# EAGLE board numi_clock (EAGLE 7.4.0)
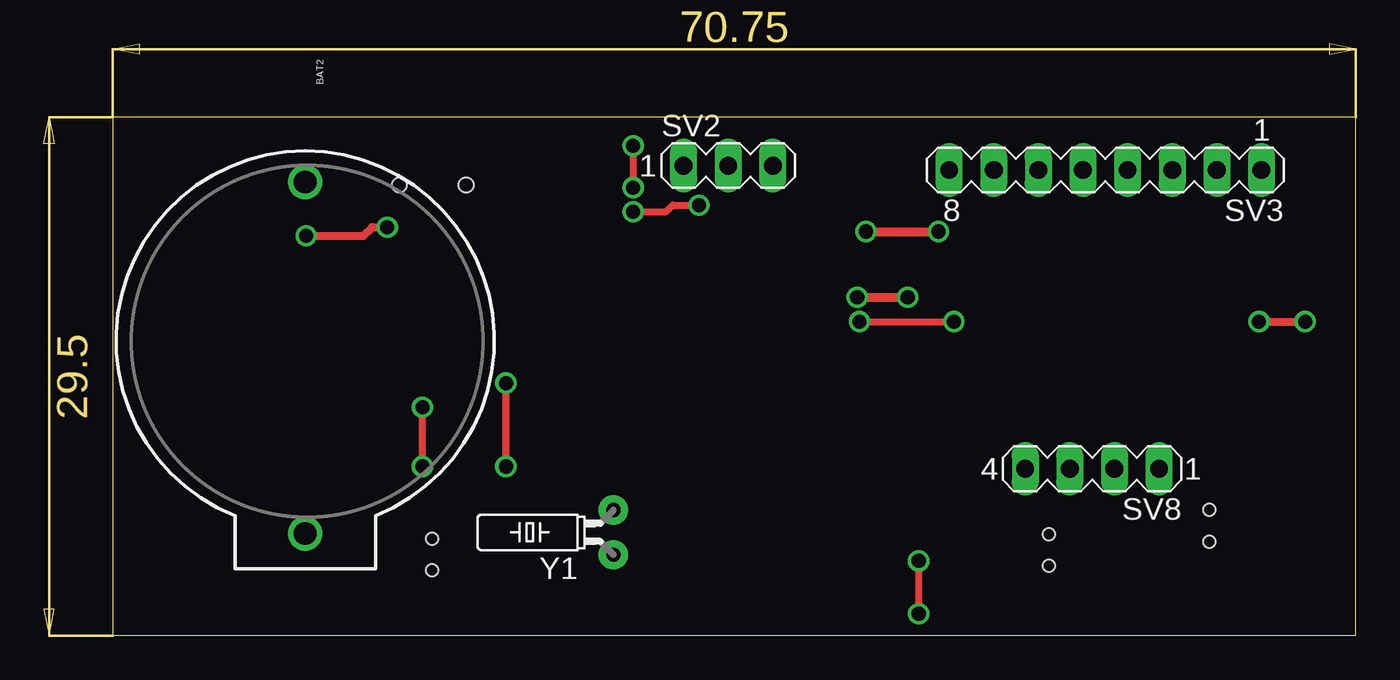
[diagram p0: board, top side]
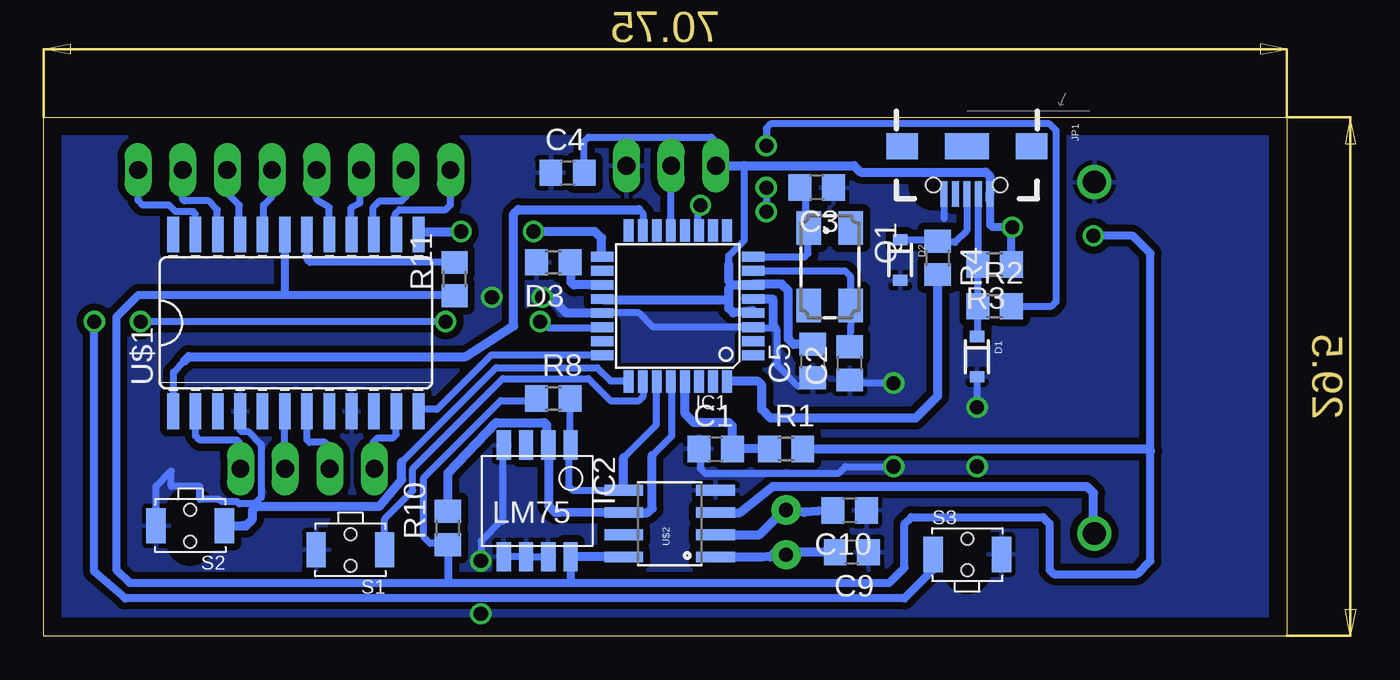
[diagram p1: board, bottom side, seen from below]

Size 70.75 x 29.5 mm. Coordinates in mm from the lower left corner, seen from the top.
Outline: 70.75,0 70.75,29.5 0,29.5 0,0 70.75,0
Copper layers (1*16): Top 0.035mm / dielectric 1.5mm / Bottom 0.035mm
Design rules "default": minimum track width 10mil, minimum drill 24mil, track to track 8mil, track to pad 8mil, pad to pad 8mil, via to via 8mil, smd to smd 8mil, copper to edge 40mil, drill to drill 8mil, minimum pad ring 10mil, minimum via ring 8mil, stop-mask expansion 4mil, vias tented up to drill 0mil, thermal gap 10mil

## Footprints (pad centres in the part's own frame; a part is rotated, then mirrored left to right if it is on the bottom)
BATTCOM_20MM_PTH = drill 1.3: 1 20,0; 2 0,0
C0805 = smd 1.3 x 1.5: 1 -0.95,0; 2 0.95,0
SOD-323 = smd 0.63 x 0.83: A 1.15,0; C -1.15,0
R0805 = smd 1.3 x 1.5: 1 -0.95,0; 2 0.95,0
TQFP32-08 = smd 1.27 x 0.559: 1 -4.293,2.8; 2 -4.293,2; 3 -4.293,1.2; 4 -4.293,0.4; 5 -4.293,-0.4; 6 -4.293,-1.2; 7 -4.293,-2; 8 -4.293,-2.8; 17 4.293,-2.8; 18 4.293,-2; 19 4.293,-1.2; 20 4.293,-0.4; 21 4.293,0.4; 22 4.293,1.2; 23 4.293,2; 24 4.293,2.8 | smd 0.559 x 1.27: 9 -2.8,-4.293; 10 -2,-4.293; 11 -1.2,-4.293; 12 -0.4,-4.293; 13 0.4,-4.293; 14 1.2,-4.293; 15 2,-4.293; 16 2.8,-4.293; 25 2.8,4.293; 26 2,4.293; 27 1.2,4.293; 28 0.4,4.293; 29 -0.4,4.293; 30 -1.2,4.293; 31 -2,4.293; 32 -2.8,4.293
SO8_LM75 = smd 0.813 x 1.676: 1 -1.27,-3.175; 2 0,-3.175; 3 1.27,-3.175; 4 2.54,-3.175; 5 2.54,3.175; 6 1.27,3.175; 7 0,3.175; 8 -1.27,3.175
USB-B-MICRO-SMD_V03 = smd 1.45 x 0.4: D+1 2.725,0; D-1 2.725,0.65; GND1 2.725,-1.3; ID1 2.725,-0.65; VBUS1 2.725,1.3 | smd 1.5 x 1.8: SHIELD1 0,3.685; SHIELD2 0,-3.685 | smd 1.5 x 2.5: SHIELD3 0,0 | hole 0.85: 2.2,1.9; 2.2,-1.9
CTS406 = smd 1.9 x 1.4: 1 -2.2,-1.2; 2 2.2,-1.2; 3 2.2,1.2; 4 -2.2,1.2
TACTILE_SWITCH-SMD-RIGHT-ANGLE = smd 1.1 x 2: 1 -1.95,0; 2 1.95,0 | hole 0.7: 0,0.9; 0,-0.9
MA03-1 = drill 1.016 long: 1 -2.54,0; 2 0,0; 3 2.54,0
MA08-1 = drill 1.016 long: 1 -8.89,0; 2 -6.35,0; 3 -3.81,0; 4 -1.27,0; 5 1.27,0; 6 3.81,0; 7 6.35,0; 8 8.89,0
MA04-1 = drill 1.016 long: 1 -3.81,0; 2 -1.27,0; 3 1.27,0; 4 3.81,0
SO24L = smd 0.66 x 2.032: 1 -6.985,-5.029; 2 -5.715,-5.029; 3 -4.445,-5.029; 4 -3.175,-5.029; 5 -1.905,-5.029; 6 -0.635,-5.029; 7 0.635,-5.029; 8 1.905,-5.029; 9 3.175,-5.029; 10 4.445,-5.029; 11 5.715,-5.029; 12 6.985,-5.029; 13 6.985,5.029; 14 5.715,5.029; 15 4.445,5.029; 16 3.175,5.029; 17 1.905,5.029; 18 0.635,5.029; 19 -0.635,5.029; 20 -1.905,5.029; 21 -3.175,5.029; 22 -4.445,5.029; 23 -5.715,5.029; 24 -6.985,5.029
SO08 = smd 0.61 x 2.21: 1 -1.905,-2.616; 2 -0.635,-2.616; 3 0.635,-2.616; 4 1.905,-2.616; 5 1.905,2.616; 6 0.635,2.616; 7 -0.635,2.616; 8 -1.905,2.616
TC26H = drill 0.813 pad 1.676: 1 -1.27,0; 2 1.27,0

## Placement (x,y rotation side)
BAT2  cr2032  [BATTCOM_20MM_PTH]  10.95,25.81 270 top
C1  100nF  [C0805]  32.5,10.62 0 bottom
C2  22pF  [C0805]  24.88,15.5 90 bottom
C3  22pF  [C0805]  26.75,25.5 180 bottom
C4  100nF  [C0805]  40.94,26.34 0 bottom
C5  100nF  [C0805]  26.98,15.62 90 bottom
C9  27pF  [C0805]  24.75,4.75 180 bottom
C10  27pF  [C0805]  24.88,7.12 180 bottom
D1  3.6V  [SOD-323]  17.62,15.88 270 bottom
D2  3.6V  [SOD-323]  22,21.38 270 bottom
D3  [R0805]  41.75,21.25 180 bottom
IC1  MEGA8-AI  [TQFP32-08]  34.66,18.76 180 bottom
IC2  LM75  [SO8_LM75]  42.03,7.66 180 bottom
JP1  micro-usb  [USB-B-MICRO-SMD_V03]  18.2,27.85 270 bottom
Q1  12MHz  [CTS406]  26.01,21 270 bottom
R1  10k  [R0805]  28.5,10.62 0 bottom
R2  68  [R0805]  16.62,18.75 0 bottom
R3  1.8k  [R0805]  16.62,21.12 180 bottom
R4  68  [R0805]  19.88,21.5 270 bottom
R8  10k  [R0805]  41.75,13.5 0 bottom
R10  10k  [R0805]  47.75,6.12 90 bottom
R11  23k  [R0805]  47.37,20.29 90 bottom
S1  SWITCH-MOMENTARY-2TACTILE-SWITCH-SMD-RIGHT-ANGLE  [TACTILE_SWITCH-SMD-RIGHT-ANGLE]  53.3,4.88 180 bottom
S2  SWITCH-MOMENTARY-2TACTILE-SWITCH-SMD-RIGHT-ANGLE  [TACTILE_SWITCH-SMD-RIGHT-ANGLE]  62.42,6.26 180 bottom
S3  SWITCH-MOMENTARY-2TACTILE-SWITCH-SMD-RIGHT-ANGLE  [TACTILE_SWITCH-SMD-RIGHT-ANGLE]  18.18,4.62 0 bottom
SV2  HC-SR505  [MA03-1]  35.03,26.75 0 top
SV3  [MA08-1]  56.5,26.5 180 top
SV8  conn digits  [MA04-1]  55.75,9.5 180 top
U$1  MAX7219CWG  [SO24L]  56.41,17.8 0 bottom
U$2  DS1307SO8  [SO08]  35.12,6.38 90 bottom
Y1  32.768kHz  [TC26H]  28.5,5.88 90 top

## Library data of the parts
BAT2 = SparkFun
C1-C5 C9 C10 R1-R4 R8 R10 R11 = rcl
D1 D2 = SparkFun-DiscreteSemi; PROD_ID: DIO-11284
D3 = sym; SPICEMODEL: NONE; SPICETYPE: diode
IC1 = atmel; MPN: ATMEGA8-16AU; OC_FARNELL: 9171371; OC_NEWARK: 73M8863
IC2 = lm75
JP1 = SparkFun-Connectors; PROD_ID: CONN-11752
Q1 = crystal; OC_FARNELL: unknown; OC_NEWARK: unknown
S1-S3 = SparkFun-Electromechanical; PROD_ID: COMP-12265
SV2 SV3 SV8 = con-lstb; OC_FARNELL: unknown; OC_NEWARK: unknown
U$1 = max7219
U$2 = SparkFun-FreqCtrl
Y1 = SparkFun-FreqCtrl; PROD_ID: XTAL-10112

## Nets
+5V: C4.2 C5.2 IC1.4 IC1.6 IC1.20 IC2.8 JP1.VBUS1 R1.2 R3.1 R8.1 R10.1 R11.1 SV2.1 U$1.19 U$2.8
A: SV3.8 U$1.14
AVCC: IC1.18
B: SV3.7 U$1.15
C: SV3.6 U$1.16
CS: IC1.24 U$1.12
D: SV3.5 U$1.17
DIG0: SV8.1 U$1.2
DIG1: SV8.2 U$1.6
DIG2: SV8.3 U$1.7
DIG3: SV8.4 U$1.11
DP: SV3.1 U$1.23
E: SV3.4 U$1.20
F: SV3.3 U$1.21
FUNC: IC1.22 S3.1
G: SV3.2 U$1.22
GND: BAT2.2 C1.1 C2.1 C3.1 C4.1 C5.1 C9.1 C10.1 D1.A D2.A D3.2 IC1.3 IC1.5 IC1.21 IC2.4 IC2.5 IC2.6 IC2.7 JP1.GND1 S1.2 S2.2 S3.2 SV2.3 U$1.4 U$1.9 U$2.4
HC: IC1.13 SV2.2
HOUR: IC1.26 S1.1
LED: D3.1 IC1.19
MINUTE: IC1.25 S2.1
MOSI: IC1.15 U$1.1
N$1: C2.2 IC1.7 Q1.3
N$2: C3.2 IC1.8 Q1.1
N$3: R11.2 U$1.18
N$4: C9.2 U$2.1 Y1.1
N$5: C10.2 U$2.2 Y1.2
N$6: BAT2.1 U$2.3
N$7: D2.C JP1.D+1 R4.1
N$8: D1.C JP1.D-1 R2.1 R3.2
N$9: IC1.32 R4.2
N$10: IC1.11 R2.2
RESET: C1.2 IC1.29 R1.1
SCK: IC1.17 U$1.13
SCL: IC1.28 IC2.2 R10.2 U$2.6
SDA: IC1.27 IC2.1 R8.2 U$2.5

## Tracks (layer width: path | path; a pad name or v marks a point on that pad's centre or on a via)
+5V  (via drill 0.8)
  Top 0.45: v11,22.75 14.25,22.75 14.75,23.25 v15.62,23.25
  Bottom 0.406: 31.75,21.12 31.75,21.62 30.88,22.5 30.88,26.75 | SV2.1 32.62,26.76 32.62,28.25 32.75,28.38 39.75,28.38 39.99,28.13 C4.2 | 57,22.79 U$1.19 | R8.1 42.83,13.38 44.75,13.38 49.12,9 49.12,5.62 48.75,5.25 47.83,5.25
  Bottom 0.45: R11.1 47.41,19.38 57,19.38 | 57,19.38 65.38,19.38 66.62,18.12 66.62,3.75 65.88,3 47.75,3 | 47.75,3 40.75,3 | 40.75,3 22.62,3 21.75,3.88 21.75,6.38 21.38,6.75 13.88,6.75 13.5,6.38 13.5,3.75 13.25,3.5 8.5,3.5 7.75,4.25 7.75,10.5 7.75,21.75 8.75,22.75 v11,22.75 | R3.1 15.68,23.2 v15.62,23.25 16.75,23.25 16.88,23.38 16.88,25.1 JP1.VBUS1 | IC2.8 40.77,3.02 40.75,3 | R10.1 47.75,3 | U$1.19 57.04,19.41 57,19.38
  Bottom 0.5: IC1.4 30.38,18.5 31.5,18.38 31.75,18.62 31.75,19.12 | 31.75,19.12 31.75,19.75 31.54,19.96 | 31.54,19.96 IC1.6 30.33,20 28.75,20 28.38,19.62 28.38,16.88 28.08,16.57 C5.2 | IC1.20 38.92,19.12 31.75,19.12 | U$2.8 37.76,4.49 IC2.8 | SV2.1 30.88,26.75 24.62,26.75 24.25,26.38 17.12,26.38 16.91,26.16 JP1.VBUS1 16.91,24.78 | 31.54,19.96 31.75,20.17 31.75,21.12 | R1.2 7.88,10.62 7.75,10.5 | 47.83,5.25 R10.1
A
  Bottom 0.406: U$1.14 50.75,22.89 50.75,24 50.5,24.25 47.88,24.25 47.61,24.52 SV3.8
B
  Bottom 0.406: U$1.15 52,22.87 52,24.38 51.62,24.75 50.38,24.75 50.15,24.98 SV3.7
C
  Bottom 0.406: U$1.16 53.25,24.38 52.75,24.62 52.75,25.88 SV3.6
CS
  Bottom 0.406: 38.99,16 IC1.24 45.29,15.96 48.38,12.88 49.32,12.88 U$1.12
  Bottom 0.5: U$1.12 49.38,12.82
D
  Bottom 0.406: U$1.17 54.5,24.38 55.12,24.75 55.25,24.88 SV3.5
DIG0
  Bottom 0.406: SV8.1 59.62,9.57 59.62,11 59.75,11.12 61.88,11.12 62.12,11.37 U$1.2
DIG1
  Bottom 0.406: SV8.2 57.04,9.52 U$1.6
DIG2
  Bottom 0.406: SV8.3 54.5,9.52 54.5,10.75 54.75,11 55.62,11 55.77,11.14 U$1.7
DIG3
  Bottom 0.406: SV8.4 52,9.56 52,11 51.75,11.25 50.88,11.25 50.69,11.43 U$1.11
DP
  Bottom 0.406: U$1.23 62.12,24 62.25,24.12 63.25,24.12 63.62,24.5 65.12,24.5 65.39,24.77 SV3.1
E
  Bottom 0.406: U$1.20 58.25,22.89 58.25,24.5 57.77,24.98 SV3.4
F
  Bottom 0.406: U$1.21 59.62,22.87 59.62,24.5 60.31,25.19 SV3.3
FUNC  (via drill 0.8)
  Top 0.406: v42.5,17.88 v47.88,17.88
  Top 0.45: v65.25,17.88 v67.88,17.88
  Bottom 0.406: IC1.22 39.01,17.5 42,17.5 v42.5,17.88 | v47.88,17.88 v65.25,17.88
  Bottom 0.45: S3.1 20.13,3.74 21.75,2.12 66.12,2.12 67.88,3.62 v67.88,17.88
G
  Bottom 0.406: U$1.22 60.88,22.85 60.88,24.25 61.38,24.75 62.75,24.75 62.85,24.85 SV3.2
GND  (via drill 0.8)
  Top 0.406: v45.88,4.25 v45.88,1.25 | v17.62,9.62 v17.62,13 | v22.38,9.62 v22.38,14.38
  Top 0.5: v42.38,19.25 v45.25,19.25
  Bottom 0.406: U$1.9 53.25,12.79 | IC1.3 30.88,17.56 | 30.88,17.56 36.06,17.56 36.88,18.38 38.94,18.38 IC1.21 | U$1.4 59.58,11.7 59.5,11.62 59.12,11.62 58.38,10.88 58.38,7.88 58.75,7.5 59.62,7.5 59.75,7.62 60.62,7.62 60.75,7.75 61.88,7.75 61.88,8.5 63.5,8.5 63.5,9.38 64.36,8.51 S2.2 | C5.1 27.8,14.18 29,15.38 29,17.38 29.12,17.5 30.81,17.5 30.88,17.56 | JP1.GND1 19.51,23.75 19.5,23.75 | IC2.7 IC2.6 IC2.5 | IC2.4 44.62,10.84 44.62,6.5 44.75,6.5 45.88,5.38 v45.88,4.25 | D1.A v17.62,13 | C1.1 33.38,10.62 33.38,9.5 33.12,9.25 25.5,9.25 25.12,9.62 v22.38,9.62 | v22.38,14.38 24.7,14.38 C2.1
  Bottom 0.5: S3.2 16.1,4.75 | IC1.5 29.28,19.16 29.25,19.12 29.25,17.62 29.12,17.5 | IC1.21 40.98,18.36 41.88,19.25 v42.38,19.25
  pour Bottom (isolate 0.406): 0.12,29.38 70.88,29.5 70.75,0 0.12,0
HC
  Bottom 0.406: IC1.13 35.06,26.73 SV2.2
HOUR
  Bottom 0.406: S1.1 51.35,6.65 49.75,8.25 49.75,9.5 44.62,14.62 39.75,14.62 38.5,13.38 36.88,13.38 36.62,13.62 36.62,14.43 IC1.26
LED
  Bottom 0.5: IC1.19 40.59,19.96 40.75,20.12 40.75,21.2 D3.1
MINUTE
  Bottom 0.406: 50.38,9.88 45,15.25 39.25,15.25 38.5,14.5 37.49,14.5
  Bottom 0.5: S2.1 59.38,6.26 59.38,6.25 59.25,6.25 58.88,6.62 58.88,7.12 58.62,7.38 51.62,7.38 50.38,8.88 50.38,9.88 | 37.49,14.5 IC1.25
MOSI
  Bottom 0.406: U$1.1 63.38,12.79 63.38,15 62.75,15.62 | IC1.15 36.62,23.09 36.62,24 36.88,24.25
  Bottom 0.5: 62.75,15.62 62.5,15.88 46.75,15.88 44,17.62 44,24 43.75,24.25 36.88,24.25
N$1
  Bottom 0.406: IC1.7 25.12,20.75 24.81,20.43 Q1.3 24.75,18.48 C2.2
N$2
  Bottom 0.406: IC1.8 27.44,21.56 27.25,21.75 27.25,22.91 Q1.1 27.21,23.96 27.38,24.12 27.38,24.92 C3.2
N$3
  Bottom 0.406: R11.2 55.61,21.24 55.75,21.38 55.75,22.81 U$1.18
N$4
  Bottom 0.5: U$2.1 29.88,4.47 Y1.1 29.4,4.48 29.12,4.75 C9.2
N$5
  Bottom 0.5: C10.2 27.47,7.02 Y1.2 28.6,7.14 30,5.75 U$2.2
N$6
  Bottom 0.5: U$2.3 31.12,7 29.25,8.5 11.38,8.5 11,8.12 11,5.87 BAT2.1
N$7
  Bottom 0.406: JP1.D+1 18.2,23.05 18.88,22.38 19.8,22.38 R4.1 20.33,22.45 20.38,22.5 21.98,22.5 D2.C
N$8
  Bottom 0.406: JP1.D-1 17.58,23.61 R3.2 R2.1 17.58,17.02 D1.C
N$9
  Bottom 0.5: IC1.32 30.09,14.47 29.88,14.25 29.88,12.88 29.38,12.38 21.12,12.38 19.88,13.62 R4.2
N$10  (via drill 0.8)
  Top 0.406: v29.62,27.88 v29.62,25.5 | v29.62,24.12 31.5,24.12 31.88,24.5 v33.38,24.5
  Bottom 0.406: v29.62,27.88 29.62,28.88 29.38,29.12 13.5,29.12 13.12,28.75 13.12,19 13.38,18.75 R2.2 | v29.62,25.5 v29.62,24.12 | 33.5,23.09 33.5,24.38 v33.38,24.5
  Bottom 0.5: IC1.11 33.5,23.09
RESET
  Bottom 0.5: R1.1 C1.2 31.55,11.93 31.75,12.12 33.75,12.12 34.25,12.62 34.25,14.46 IC1.29
SCK  (via drill 0.8)
  Top 0.5: v42.88,23 v47,23
  Bottom 0.406: U$1.13 49.42,22.95
  Bottom 0.5: IC1.17 39,21.61 39,22.62 39.38,23 v42.88,23 | U$1.13 49.25,23 v47,23
SCL
  Bottom 0.406: IC1.28 35,14.41 35,11.38 36.12,10.25
  Bottom 0.5: 36.12,10.25 36.12,7.25 36.38,7 37.73,7 U$2.6 41.38,7 41.62,7 42,7.38 42,10.8 IC2.2 42.12,10.93 42.12,12 42.25,12.12 45,12.12 47.75,9.25 R10.2
SDA
  Bottom 0.406: IC1.27 35.88,14.45 35.88,12 37.75,10.12 | U$2.5 40.66,8.28 40.88,8.5 40.88,10.73 IC2.1 40.8,10.88 R8.2
  Bottom 0.5: U$2.5 37.75,10.12